# Altium PCB IMX6WBED.PcbDoc (part 8 of 10)
Units mil, origin at the board's own origin, x right, y up, seen from the top; angles counter-clockwise.
Board outline 3318.23 x 4815.16 mil, 6 copper layers (Top Layer, L2_GND_1, L3_INT_1, L6_INT_2, L7_PWR_2, Bottom Layer), stack 27.7 mil thick; 504 components, 400 nets, 2357 pads, 1199 vias.
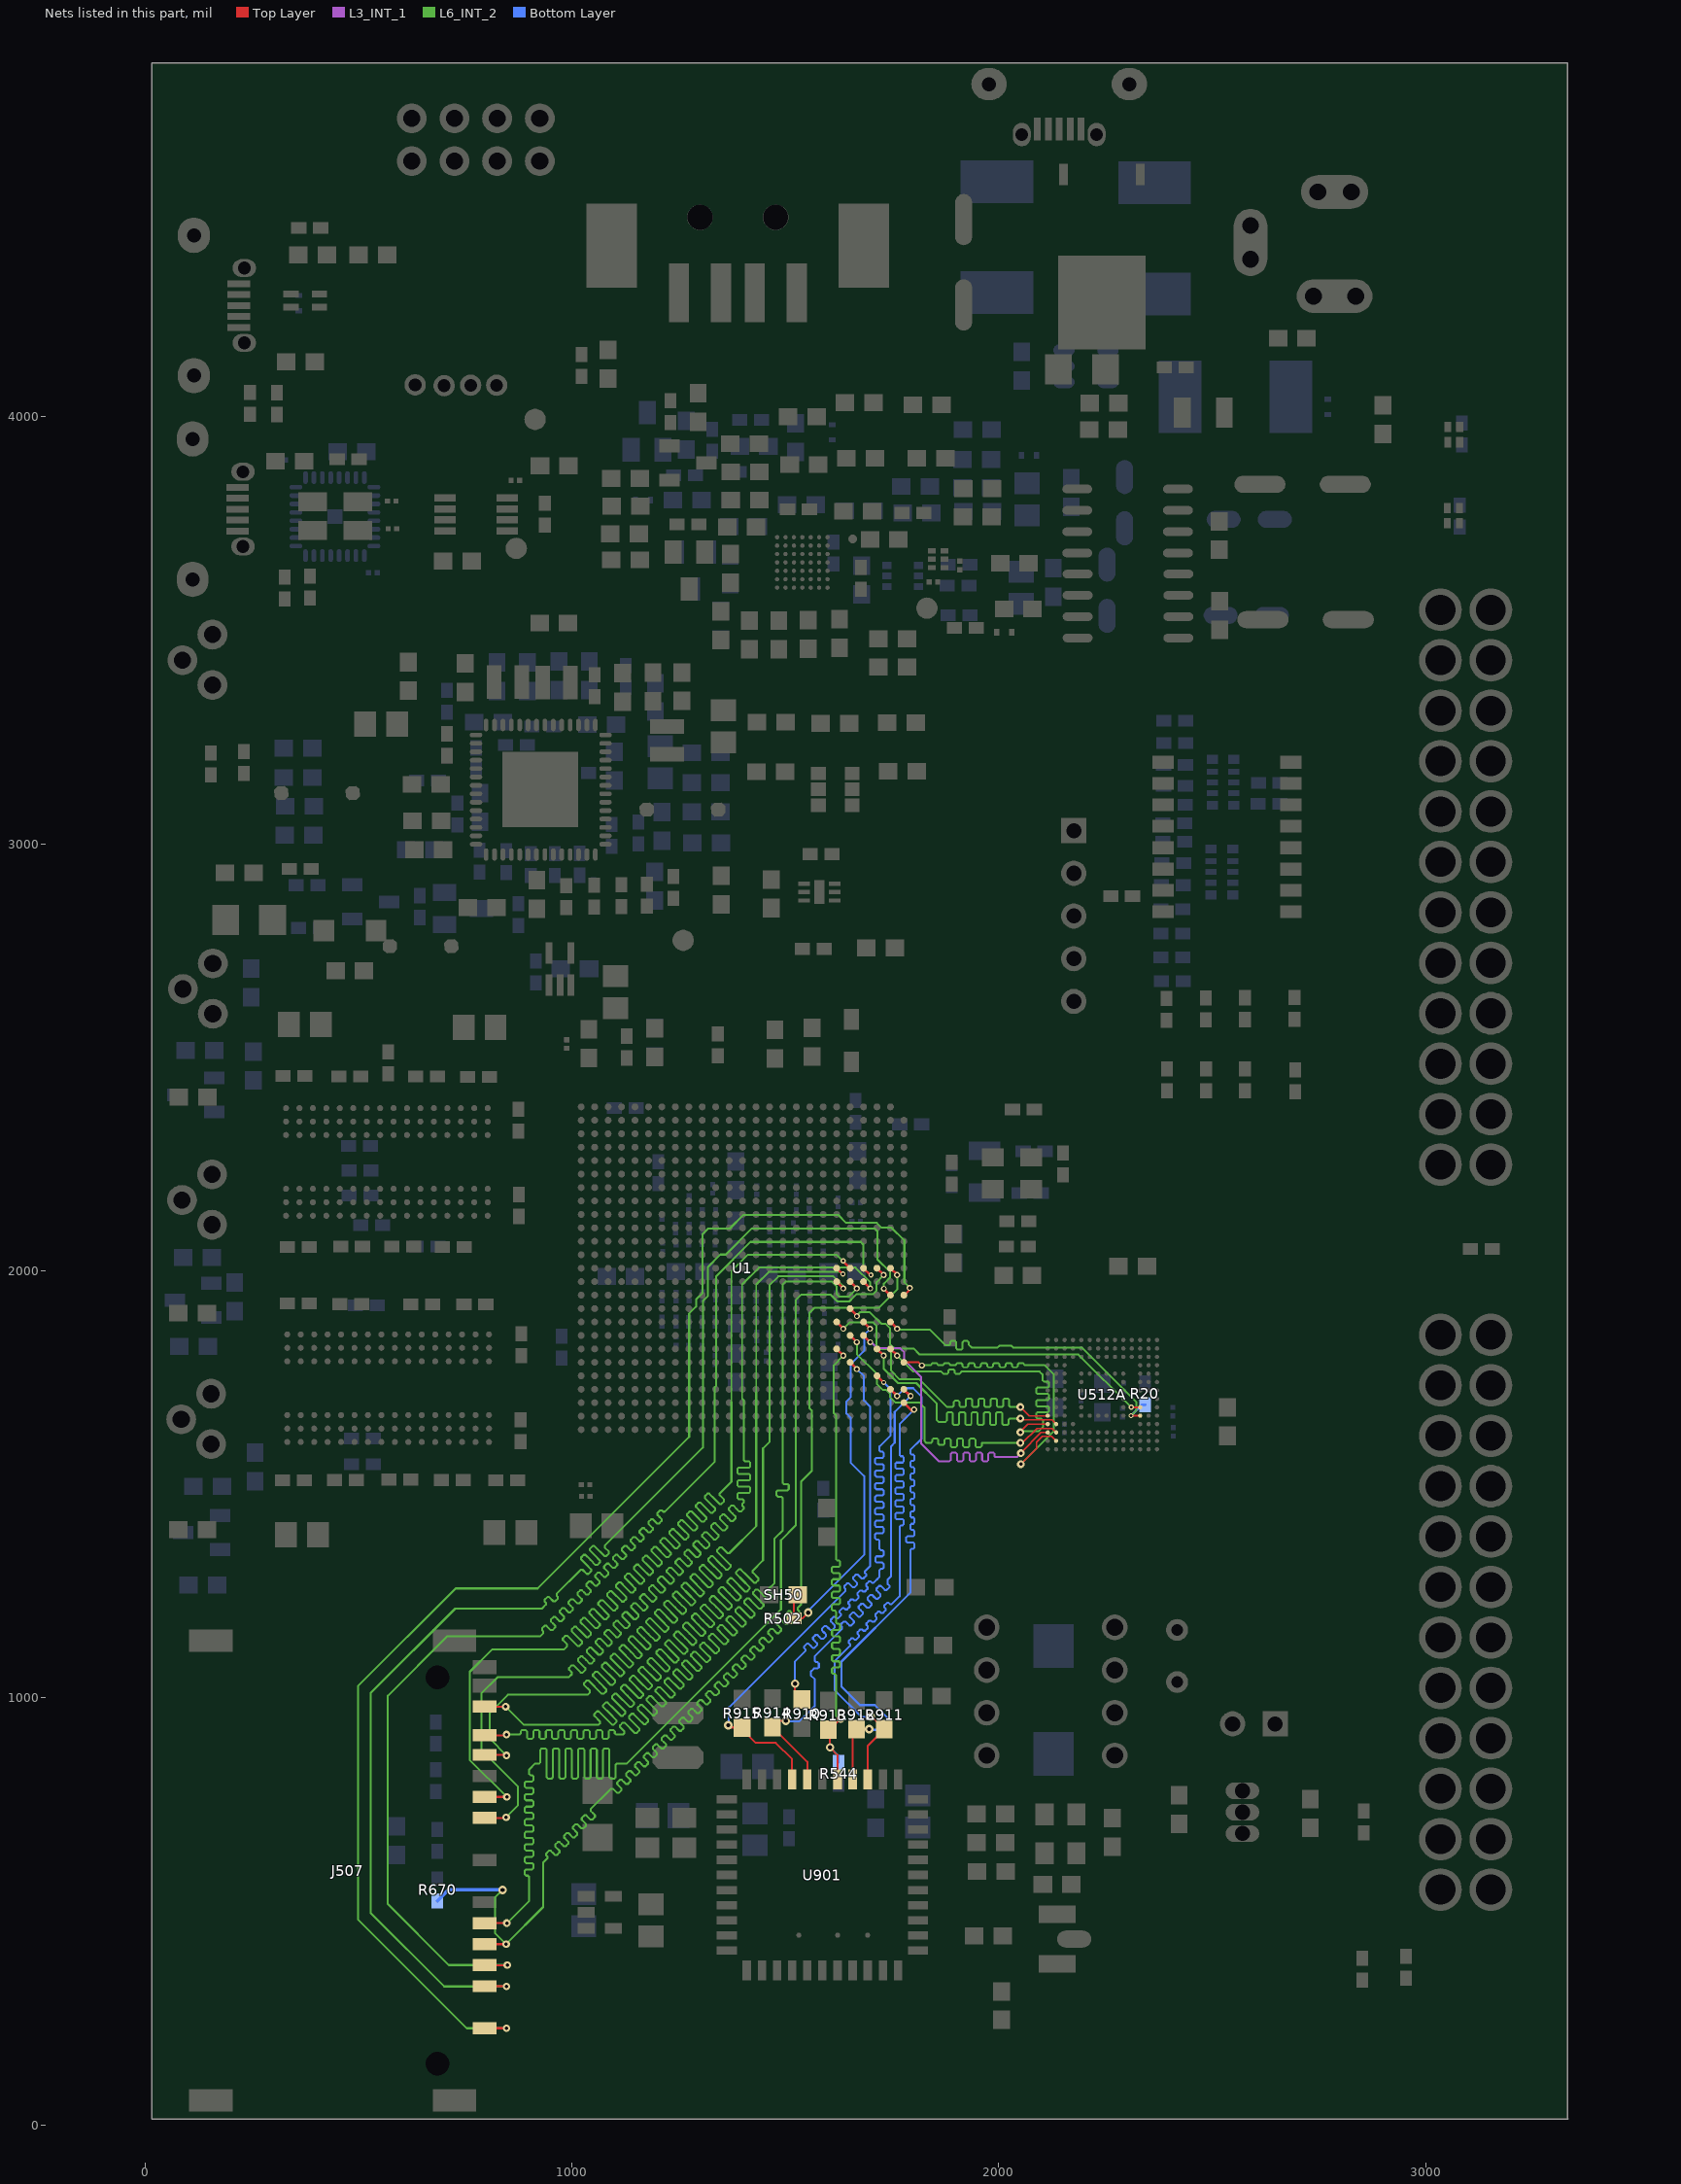
[diagram p12: the nets of this part, all layers, seen from the top]

## Via types
v1: diameter 14, hole 8, Top Layer to Bottom Layer, 296 vias
v2: diameter 14, hole 8, Top Layer to Bottom Layer, tented both sides, 244 vias
v3: diameter 20, hole 10, Top Layer to Bottom Layer, 221 vias
v4: diameter 20, hole 10, Top Layer to Bottom Layer, tented both sides, 112 vias
v5: diameter 18, hole 8, Top Layer to Bottom Layer, tented both sides, 74 vias
v6: diameter 12, hole 6, Top Layer to Bottom Layer, tented both sides, 60 vias
v7: diameter 16, hole 8, Top Layer to Bottom Layer, 59 vias
v8: diameter 30, hole 15, Top Layer to Bottom Layer, 33 vias
v9: diameter 40, hole 20, Top Layer to Bottom Layer, 16 vias
v10: diameter 30, hole 15, Top Layer to Bottom Layer, tented both sides, 16 vias
v11: diameter 18, hole 8, Top Layer to Bottom Layer, 16 vias
v12: diameter 12, hole 6, Top Layer to Bottom Layer, 13 vias
v13: diameter 16, hole 8, Top Layer to Bottom Layer, tented both sides, 8 vias
v14: diameter 80, hole 40, Top Layer to Bottom Layer, 5 vias
v15: diameter 14, hole 6, Top Layer to Bottom Layer, tented both sides, 4 vias
v16: diameter 50, hole 30, Top Layer to Bottom Layer, 3 vias
v17: diameter 16, hole 10, Top Layer to Bottom Layer, 3 vias
v18: diameter 25, hole 15, Top Layer to Bottom Layer, tented both sides, 3 vias
v19: diameter 35, hole 20, Top Layer to Bottom Layer, tented both sides, 3 vias
v20: diameter 10, hole 6, Top Layer to Bottom Layer, 3 vias
v21: diameter 18, hole 10, Top Layer to Bottom Layer, tented both sides, 2 vias
v22: diameter 80, hole 45, Top Layer to Bottom Layer, 1 vias
v23: diameter 40, hole 20, Top Layer to Bottom Layer, tented both sides, 1 vias
v24: diameter 11, hole 6, Top Layer to Bottom Layer, tented both sides, 1 vias
v25: diameter 13, hole 6, Top Layer to Bottom Layer, tented both sides, 1 vias
v26: diameter 14, hole 6, Top Layer to Bottom Layer, 1 vias

## Nets (pads, with @x,y where several pads share a name; then routed paths per layer and width w, separated by ;. In a path a pad name is that pad's centre, name@x,y a point inside that pad or via, vN(x,y) a via of type N, cw(c..) or ccw(c..) an arc to the next point about the centre after c; other vN are vias at no path point) (continued)
SD2_CLK: R910.2 U1.C21 | length 1300
  Top Layer w4.7: v3(1522.43,1033.01) 1522.43,1012.4 R910.2@1538.47,996.36
  Top Layer w6: U1.C21@1714.48,1753.98 v6(1730.23,1738.23)
  Bottom Layer w4.7: v3@1521.81,1031.01 v3@1522.43,1031.01 ; v3(1522.43,1033.01) 1522.43,1085.2 1531.81,1094.58 1546.55,1109.32 1546.55,1113.48 1543.84,1116.19 1543.84,1120.35 1550.08,1126.58 1554.24,1126.58 1559.03,1121.8 1563.81,1117.01 1567.97,1117.01 1574.21,1123.24 1574.21,1127.4 1569.42,1132.19 1564.63,1136.98 1564.63,1141.14 1570.87,1147.37 1575.03,1147.37 1579.81,1142.58 1584.6,1137.8 1588.76,1137.8 1595,1144.03 1595,1148.19 1590.21,1152.98 1585.42,1157.77 1585.42,1161.92 1591.66,1168.16 1595.82,1168.16 1600.6,1163.37 1605.39,1158.59 1609.55,1158.59 1615.79,1164.82 1615.79,1168.98 1611,1173.77 1606.21,1178.56 1606.21,1182.71 1612.45,1188.95 1616.61,1188.95 1619.31,1186.24 1623.47,1186.24 1629.71,1192.48 1629.71,1196.64 1627,1199.34 1627,1203.5 1633.24,1209.74 1637.39,1209.74 1640.1,1207.03 1644.26,1207.03 1650.5,1213.27 1650.5,1217.42 1647.79,1220.13 1647.79,1224.29 1654.03,1230.53 1658.18,1230.53 1660.89,1227.82 1665.05,1227.82 1671.29,1234.06 1671.29,1238.21 1668.58,1240.92 1668.58,1245.08 1674.81,1251.32 1678.97,1251.32 1681.68,1248.61 1685.84,1248.61 1692.07,1254.84 1692.07,1259 1689.37,1261.71 1689.37,1265.87 1695.6,1272.11 1699.76,1272.11 1702.47,1269.4 1706.63,1269.4 1714.94,1277.71 1720.14,1282.91 1720.14,1287.05 1720.14,1298.81 1723.08,1301.75 1726.91,1301.75 1729.85,1304.69 1729.85,1313.51 1726.91,1316.45 1720.14,1316.45 1713.37,1316.45 1710.43,1319.39 1710.43,1328.21 1713.37,1331.15 1720.14,1331.15 1726.91,1331.15 1729.85,1334.09 1729.85,1342.91 1726.91,1345.85 1723.08,1345.85 1720.14,1348.79 1720.14,1353.2 1720.14,1366.02 1720.14,1367.65 1717.2,1370.59 1713.16,1370.59 1710.22,1373.53 1710.22,1382.35 1713.16,1385.29 1720.14,1385.29 1727.12,1385.29 1730.06,1388.23 1730.06,1397.05 1727.12,1399.99 1720.14,1399.99 1713.16,1399.99 1710.22,1402.93 1710.22,1411.75 1713.16,1414.69 1720.14,1414.69 1727.12,1414.69 1730.06,1417.63 1730.06,1426.45 1727.12,1429.39 1720.14,1429.39 1713.16,1429.39 1710.22,1432.33 1710.22,1441.15 1713.16,1444.09 1720.14,1444.09 1727.12,1444.09 1730.06,1447.03 1730.06,1455.85 1727.12,1458.79 1720.14,1458.79 1713.16,1458.79 1710.22,1461.73 1710.22,1470.55 1713.16,1473.49 1720.14,1473.49 1727.12,1473.49 1730.06,1476.43 1730.06,1485.25 1727.12,1488.19 1720.14,1488.19 1713.16,1488.19 1710.22,1491.13 1710.22,1499.95 1713.16,1502.89 1720.14,1502.89 1727.12,1502.89 1730.06,1505.83 1730.06,1514.65 1727.12,1517.59 1720.14,1517.59 1713.16,1517.59 1710.22,1520.53 1710.22,1529.35 1713.16,1532.29 1720.14,1532.29 1727.12,1532.29 1730.06,1535.23 1730.06,1544.05 1727.12,1546.99 1720.14,1546.99 1713.16,1546.99 1710.22,1549.93 1710.22,1558.75 1713.16,1561.69 1720.14,1561.69 1727.12,1561.69 1730.06,1564.63 1730.06,1573.45 1727.12,1576.39 1723.08,1576.39 1720.14,1579.33 1720.14,1583.74 1720.14,1588.3 1746.47,1614.63 1746.47,1721.99 v6(1730.23,1738.23)
SD2_CMD: R544.1 R913.1 U1.F19 U901.16 | length 1342.2
  Top Layer w4.7: U901.16@1622,808.95 1622,866.07 v3(1604.29,883.78) 1604.29,918.21 1605.99,919.91 R913.1@1600.47,925.44 1604.02,925.44 v3(1629.76,951.18)
  Top Layer w6: U1.F19@1619.99,1816.97 v2(1635.74,1801.22)
  L6_INT_2 w4.5: 1613.47,1728.9 1613.38,1728.99 1613.38,1778.87 v2(1635.74,1801.22)
  L6_INT_2 w4.7: 1613.47,1728.9 1613.47,1666.9 1618.47,1661.9 1618.47,1329.07 1618.47,1324.66 1621.41,1321.72 1625.24,1321.72 1628.18,1318.78 1628.18,1309.96 1625.24,1307.02 1618.47,1307.02 1611.7,1307.02 1608.76,1304.08 1608.76,1295.26 1611.7,1292.32 1618.47,1292.32 1625.24,1292.32 1628.18,1289.38 1628.18,1280.56 1625.24,1277.62 1618.47,1277.62 1611.7,1277.62 1608.76,1274.68 1608.76,1265.86 1611.7,1262.92 1618.47,1262.92 1625.24,1262.92 1628.18,1259.98 1628.18,1251.16 1625.24,1248.22 1618.47,1248.22 1611.7,1248.22 1608.76,1245.28 1608.76,1236.46 1611.7,1233.52 1618.47,1233.52 1625.24,1233.52 1628.18,1230.58 1628.18,1221.76 1625.24,1218.82 1618.47,1218.82 1611.7,1218.82 1608.76,1215.88 1608.76,1207.06 1611.7,1204.12 1615.53,1204.12 1618.47,1201.18 1618.47,1184.69 1618.47,1180.83 1618.47,1176.42 1621.41,1173.48 1624.93,1173.48 1627.87,1170.54 1627.87,1161.72 1624.93,1158.78 1618.47,1158.78 1612.01,1158.78 1609.07,1155.84 1609.07,1147.02 1612.01,1144.08 1618.47,1144.08 1624.93,1144.08 1627.87,1141.14 1627.87,1132.32 1624.93,1129.38 1618.47,1129.38 1612.01,1129.38 1609.07,1126.44 1609.07,1117.62 1612.01,1114.68 1618.47,1114.68 1624.93,1114.68 1627.87,1111.74 1627.87,1102.92 1624.93,1099.98 1618.47,1099.98 1612.01,1099.98 1609.07,1097.04 1609.07,1088.22 1612.01,1085.28 1618.47,1085.28 1624.93,1085.28 1627.87,1082.34 1627.87,1073.52 1624.93,1070.58 1618.47,1070.58 1612.01,1070.58 1609.07,1067.64 1609.07,1058.82 1612.01,1055.88 1615.53,1055.88 1618.47,1052.94 1618.47,1043.94 1618.47,958.25 v3@1626.54,950.18
  Bottom Layer w4.7: v3(1604.29,883.78) 1624.47,863.6 R544.1@1624.47,848.49
SD2_DATA0: R914.1 U1.A22 U901.18 | length 1296.7
  Top Layer w4.7: v3(1501.07,945.91) 1483.94,945.91 R914.1@1469.47,931.44 1551.14,849.77 U901.18@1551.14,808.95
  Top Layer w6: U1.A22@1777.47,1722.48 v2(1793.22,1706.74)
  Bottom Layer w4.7: v3@1500.12,945.04 1532.65,945.04 1568.86,981.24 1568.86,1042.89 1559.11,1052.63 1559.11,1060.88 1566.66,1068.43 1575.32,1068.43 1578.25,1071.37 1578.25,1080.19 1575.32,1083.13 1571.79,1083.13 1568.86,1086.07 1568.86,1097.47 1632.7,1161.32 1632.7,1165.48 1630.07,1168.1 1630.07,1172.26 1636.31,1178.5 1640.47,1178.5 1645.17,1173.79 1649.88,1169.09 1654.04,1169.09 1660.27,1175.32 1660.27,1179.48 1650.86,1188.89 1650.86,1193.05 1657.1,1199.29 1661.25,1199.29 1670.67,1189.87 1674.83,1189.87 1681.06,1196.11 1681.06,1200.27 1676.36,1204.98 1671.65,1209.68 1671.65,1213.84 1677.89,1220.08 1682.04,1220.08 1691.46,1210.66 1695.61,1210.66 1701.85,1216.9 1701.85,1221.06 1692.44,1230.47 1692.44,1234.63 1698.68,1240.87 1702.83,1240.87 1707.54,1236.16 1712.25,1231.45 1716.4,1231.45 1722.64,1237.69 1722.64,1241.85 1717.93,1246.55 1713.23,1251.26 1713.23,1255.42 1719.46,1261.65 1723.62,1261.65 1733.03,1252.24 1737.19,1252.24 1743.43,1258.48 1743.43,1262.64 1739.13,1266.94 1739.13,1276.02 1747.38,1284.27 1747.38,1588.74 1755.8,1597.16 1755.8,1669.32 v2(1793.22,1706.74)
SD2_DATA1: R915.1 U1.E20 U901.19 | length 1296.5
  Top Layer w4.7: v3(1365.98,935.51) 1371.05,930.44 R915.1@1398.47,930.44 1398.47,926.25 1430.45,894.27 1477.19,894.27 1515.28,856.18 1515.28,809.38 U901.19@1515.71,808.95
  Top Layer w6: U1.E20@1651.49,1785.48 v2(1667.23,1769.73)
  Bottom Layer w4.7: v3@1367.47,935.51 1367.47,977.52 1640.58,1250.63 1640.58,1254.79 1638.09,1257.28 1638.09,1261.44 1644.33,1267.67 1648.49,1267.67 1653.05,1263.11 1657.62,1258.54 1661.78,1258.54 1668.02,1264.77 1668.02,1268.93 1663.45,1273.5 1658.88,1278.07 1658.88,1282.23 1665.12,1288.46 1669.27,1288.46 1678.41,1279.33 1682.57,1279.33 1688.8,1285.56 1688.8,1289.72 1686.32,1292.21 1686.32,1296.37 1698.47,1308.52 1698.47,1681.83 1683.77,1696.53 1683.77,1753.2 v2(1667.23,1769.73)
SD2_DATA2: R911.1 U1.A23 U901.14 | length 1294.6
  Top Layer w4.7: U901.14@1692.86,808.95 1692.86,887.83 R911.1@1731.47,926.44 1702.06,955.85 v3(1699.25,955.85)
  Top Layer w6: U1.A23@1777.47,1690.99 v2@1797.51,1670.94
  Bottom Layer w4.7: v3@1699.25,955.09 1678.26,955.09 1615.11,1018.24 1615.11,1085.51 1620.84,1091.24 1651.25,1121.65 1651.25,1125.81 1648.34,1128.73 1648.34,1132.88 1654.58,1139.12 1658.74,1139.12 1661.65,1136.21 1665.81,1136.21 1672.04,1142.44 1672.04,1146.6 1669.13,1149.51 1669.13,1153.67 1675.37,1159.91 1679.52,1159.91 1682.44,1157 1686.6,1157 1692.83,1163.23 1692.83,1167.39 1689.92,1170.3 1689.92,1174.46 1696.16,1180.7 1700.31,1180.7 1703.23,1177.78 1707.38,1177.78 1713.62,1184.02 1713.62,1188.18 1710.71,1191.09 1710.71,1195.25 1716.94,1201.49 1721.1,1201.49 1724.02,1198.57 1728.17,1198.57 1734.41,1204.81 1734.41,1208.97 1731.5,1211.88 1731.5,1216.04 1737.73,1222.28 1741.89,1222.28 1744.8,1219.36 1748.96,1219.36 1757.28,1227.68 1762.47,1232.88 1767.39,1237.79 1767.39,1400.92 1770.33,1403.86 1774.45,1403.86 1777.39,1406.8 1777.39,1415.62 1774.45,1418.56 1760.33,1418.56 1757.39,1421.5 1757.39,1430.32 1760.33,1433.26 1774.45,1433.26 1777.39,1436.2 1777.39,1445.02 1774.45,1447.96 1760.33,1447.96 1757.39,1450.9 1757.39,1459.72 1760.33,1462.66 1774.45,1462.66 1777.39,1465.6 1777.39,1474.42 1774.45,1477.36 1760.33,1477.36 1757.39,1480.3 1757.39,1489.12 1760.33,1492.06 1774.45,1492.06 1777.39,1495 1777.39,1503.82 1774.45,1506.76 1760.33,1506.76 1757.39,1509.7 1757.39,1518.52 1760.33,1521.46 1774.45,1521.46 1777.39,1524.4 1777.39,1533.22 1774.45,1536.16 1760.33,1536.16 1757.39,1539.1 1757.39,1547.92 1760.33,1550.86 1774.45,1550.86 1777.39,1553.8 1777.39,1562.62 1774.45,1565.56 1770.33,1565.56 1767.39,1568.5 1767.39,1640.82 v2(1801.47,1674.9)
SD2_DATA3: R912.1 U1.B22 U901.15 | length 1296
  Top Layer w4.7: U901.15@1657.43,808.95 1657.43,917.4 R912.1@1666.47,926.44
  Top Layer w6: U1.B22@1745.97,1722.48 v2(1761.72,1706.74)
  Bottom Layer w4.7: v3@1696.04,924.86 1729.36,924.86 1737.65,933.15 1737.65,954.52 1709.29,982.88 1674.39,982.88 1631.21,1026.06 1631.21,1084.69 1792.42,1245.9 1792.42,1345.09 1792.42,1345.73 1795.36,1348.67 1799.19,1348.67 1802.13,1351.61 1802.13,1360.43 1799.19,1363.37 1792.42,1363.37 1785.65,1363.37 1782.71,1366.31 1782.71,1375.13 1785.65,1378.07 1792.42,1378.07 1799.19,1378.07 1802.13,1381.01 1802.13,1389.83 1799.19,1392.77 1795.36,1392.77 1792.42,1395.71 1792.42,1404.53 1795.36,1407.47 1799.19,1407.47 1802.13,1410.41 1802.13,1419.23 1799.19,1422.17 1795.36,1422.17 1792.42,1425.11 1792.42,1433.93 1795.36,1436.87 1799.19,1436.87 1802.13,1439.81 1802.13,1448.63 1799.19,1451.57 1795.36,1451.57 1792.42,1454.51 1792.42,1463.33 1795.36,1466.27 1799.19,1466.27 1802.13,1469.21 1802.13,1478.03 1799.19,1480.97 1795.36,1480.97 1792.42,1483.91 1792.42,1492.73 1795.36,1495.67 1799.19,1495.67 1802.13,1498.61 1802.13,1507.43 1799.19,1510.37 1795.36,1510.37 1792.42,1513.31 1792.42,1522.13 1795.36,1525.07 1799.19,1525.07 1802.13,1528.01 1802.13,1536.83 1799.19,1539.77 1795.36,1539.77 1792.42,1542.71 1792.42,1551.53 1795.36,1554.47 1799.19,1554.47 1802.13,1557.41 1802.13,1566.23 1799.19,1569.17 1795.36,1569.17 1792.42,1572.11 1792.42,1576.52 1792.42,1580.03 1819.51,1607.12 1819.51,1704.86 1799.47,1724.9 1779.89,1724.9 v2(1761.72,1706.74)
  other v3: 1696.04,926.63
SD2_WP: R502.1 SH50.1 U1.D17 | length 875
  Top Layer w4.7: SH50.1@1523.93,1235.9 1520.06,1232.03 R502.1@1520.06,1185.9 1539.62,1185.9 v3(1553.26,1199.54)
  Top Layer w6: U1.D17@1682.98,1879.96 1698.73,1864.22 v2(1698.23,1864.22)
  Bottom Layer w4.7: v3@1549.61,1199.15 1549.61,1199.81 1684.47,1334.67 1684.47,1518.9 1652.47,1550.9 1652.47,1656.14 1642.98,1665.63 1642.98,1674.29 1642.87,1674.4 1642.87,1694.03 1652.47,1703.63 1652.47,1780.9 1684.47,1812.9 1684.47,1849.96 1698.73,1864.22 v2(1698.23,1864.22)
SD3_CLK: J507.5 U1.D14 | length 3217.5
  Top Layer w4.7: J507.5@795.34,718.52 v5@846.85,718.52
  Top Layer w6: U1.D14@1682.98,1974.45 v2(1698.73,1958.7)
  L6_INT_2 w4.5: 787.47,1009.9 787.47,877.9 873.47,791.9 873.47,747.9 v5(845.47,719.9) ; 1402.47,1696.9 1398.47,1700.9 1398.47,1967.9 1438.07,2007.5 1663.87,2007.5 1698.73,1972.64 v2(1698.73,1958.7)
  L6_INT_2 w4.7: 787.47,1009.9 825.47,1047.9 992.47,1047.9 999.59,1055.02 999.59,1059.18 993.14,1065.62 993.14,1069.78 999.38,1076.02 1003.53,1076.02 1020.59,1058.96 1024.75,1058.96 1030.98,1065.2 1030.98,1069.36 1013.93,1086.41 1013.93,1090.57 1020.17,1096.81 1024.32,1096.81 1032.85,1088.28 1041.38,1079.75 1045.54,1079.75 1051.77,1085.99 1051.77,1090.15 1034.72,1107.2 1034.72,1111.36 1040.95,1117.6 1045.11,1117.6 1062.17,1100.54 1066.33,1100.54 1072.56,1106.78 1072.56,1110.94 1064.03,1119.46 1055.51,1127.99 1055.51,1132.15 1061.74,1138.39 1065.9,1138.39 1082.96,1121.33 1087.11,1121.33 1093.35,1127.57 1093.35,1131.73 1076.3,1148.78 1076.3,1152.94 1082.53,1159.18 1086.69,1159.18 1103.75,1142.12 1107.9,1142.12 1114.14,1148.36 1114.14,1152.51 1097.08,1169.57 1097.08,1173.73 1103.32,1179.96 1107.48,1179.96 1124.53,1162.91 1128.69,1162.91 1134.93,1169.15 1134.93,1173.3 1117.87,1190.36 1117.87,1194.52 1124.11,1200.75 1128.27,1200.75 1145.32,1183.7 1149.48,1183.7 1155.72,1189.93 1155.72,1194.09 1138.66,1211.15 1138.66,1215.31 1144.9,1221.54 1149.06,1221.54 1166.11,1204.49 1170.27,1204.49 1176.51,1210.72 1176.51,1214.88 1167.98,1223.41 1159.45,1231.94 1159.45,1236.09 1165.69,1242.33 1169.85,1242.33 1186.9,1225.28 1191.06,1225.28 1197.3,1231.51 1197.3,1235.67 1180.24,1252.73 1180.24,1256.88 1186.48,1263.12 1190.63,1263.12 1207.69,1246.06 1211.85,1246.06 1218.08,1252.3 1218.08,1256.46 1201.03,1273.51 1201.03,1277.67 1207.27,1283.91 1211.42,1283.91 1228.48,1266.85 1232.64,1266.85 1238.87,1273.09 1238.87,1277.25 1221.82,1294.3 1221.82,1298.46 1228.05,1304.7 1232.21,1304.7 1249.27,1287.64 1253.43,1287.64 1259.66,1293.88 1259.66,1298.04 1242.61,1315.09 1242.61,1319.25 1248.84,1325.49 1253,1325.49 1270.06,1308.43 1274.21,1308.43 1280.45,1314.67 1280.45,1318.83 1271.92,1327.35 1263.4,1335.88 1263.4,1340.04 1269.63,1346.28 1273.79,1346.28 1290.85,1329.22 1295,1329.22 1301.24,1335.46 1301.24,1339.61 1284.18,1356.67 1284.18,1360.83 1290.42,1367.06 1294.58,1367.06 1303.11,1358.54 1311.63,1350.01 1315.79,1350.01 1322.03,1356.25 1322.03,1360.4 1304.97,1377.46 1304.97,1381.62 1311.21,1387.85 1315.37,1387.85 1332.42,1370.8 1336.58,1370.8 1342.82,1377.03 1342.82,1381.19 1325.76,1398.25 1325.76,1402.41 1332,1408.64 1336.16,1408.64 1353.21,1391.59 1357.37,1391.59 1363.61,1397.82 1363.61,1401.98 1346.55,1419.04 1346.55,1423.19 1352.79,1429.43 1356.95,1429.43 1365.47,1420.9 1372.73,1413.65 1376.88,1413.65 1383.12,1419.89 1383.12,1424.04 1375.87,1431.3 1367.34,1439.83 1367.34,1443.98 1373.58,1450.22 1377.73,1450.22 1386.26,1441.69 1391.72,1436.24 1395.88,1436.24 1402.11,1442.47 1402.11,1446.63 1398.74,1450.01 1398.74,1454.17 1402.47,1457.9 1402.47,1462.31 1399.53,1465.25 1390.41,1465.25 1387.47,1468.19 1387.47,1477.01 1390.41,1479.95 1414.53,1479.95 1417.47,1482.89 1417.47,1491.71 1414.53,1494.65 1390.41,1494.65 1387.47,1497.59 1387.47,1506.41 1390.41,1509.35 1414.53,1509.35 1417.47,1512.29 1417.47,1521.11 1414.53,1524.05 1390.41,1524.05 1387.47,1526.99 1387.47,1535.81 1390.41,1538.75 1414.53,1538.75 1417.47,1541.69 1417.47,1550.51 1414.53,1553.45 1405.41,1553.45 1402.47,1556.39 1402.47,1696.9
SD3_CMD: J507.2 R670.1 U1.B13 | length 3277.5
  Top Layer w4.7: J507.2@795.34,422.85 v5(845.47,422.85) v5@846.42,422.85
  Top Layer w6: U1.B13@1745.97,2005.95 v2(1761.72,1990.2)
  L6_INT_2 w4.7: v4(837.47,549.9) 819.47,531.9 819.47,448.85 v5(845.47,422.85) 932.47,509.85 932.47,613.9 942.6,624.03 942.6,628.19 939.69,631.1 939.69,635.26 945.93,641.5 950.08,641.5 955.08,636.51 960.07,631.51 964.23,631.51 970.46,637.75 970.46,641.91 960.48,651.89 960.48,656.05 966.72,662.29 970.87,662.29 975.87,657.3 980.86,652.3 985.02,652.3 991.25,658.54 991.25,662.7 986.26,667.69 981.27,672.68 981.27,676.84 987.5,683.08 991.66,683.08 1001.65,673.09 1005.8,673.09 1012.04,679.33 1012.04,683.49 1002.06,693.47 1002.06,697.63 1008.29,703.87 1012.45,703.87 1017.44,698.87 1022.44,693.88 1026.59,693.88 1032.83,700.12 1032.83,704.28 1022.85,714.26 1022.85,718.42 1029.08,724.65 1033.24,724.65 1043.22,714.67 1047.38,714.67 1053.62,720.91 1053.62,725.07 1048.63,730.06 1043.63,735.05 1043.63,739.21 1087.6,783.18 1091.45,787.02 1095.61,787.02 1105.59,777.04 1109.75,777.04 1115.99,783.27 1115.99,787.43 1106,797.42 1106,801.57 1112.24,807.81 1116.4,807.81 1121.39,802.82 1126.38,797.83 1130.54,797.83 1136.78,804.06 1136.78,808.22 1126.79,818.21 1126.79,822.36 1133.03,828.6 1137.19,828.6 1147.17,818.62 1151.33,818.62 1157.56,824.85 1157.56,829.01 1152.57,834 1147.58,838.99 1147.58,843.15 1153.82,849.39 1157.97,849.39 1162.97,844.4 1167.96,839.4 1172.12,839.4 1178.35,845.64 1178.35,849.8 1168.37,859.78 1168.37,863.94 1174.61,870.18 1178.76,870.18 1183.76,865.19 1188.75,860.19 1192.91,860.19 1199.14,866.43 1199.14,870.59 1194.15,875.58 1189.16,880.57 1189.16,884.73 1195.39,890.97 1199.55,890.97 1209.54,880.98 1213.69,880.98 1219.93,887.22 1219.93,891.38 1214.94,896.37 1209.95,901.36 1209.95,905.52 1216.18,911.76 1220.34,911.76 1225.33,906.76 1230.33,901.77 1234.48,901.77 1240.72,908.01 1240.72,912.17 1230.74,922.15 1230.74,926.31 1236.97,932.54 1241.13,932.54 1251.11,922.56 1255.27,922.56 1261.51,928.8 1261.51,932.95 1256.52,937.95 1251.52,942.94 1251.52,947.1 1257.76,953.33 1261.92,953.33 1271.9,943.35 1276.06,943.35 1282.3,949.59 1282.3,953.74 1272.31,963.73 1272.31,967.89 1278.55,974.12 1282.71,974.12 1287.7,969.13 1292.69,964.14 1296.85,964.14 1303.09,970.37 1303.09,974.53 1298.09,979.52 1293.1,984.52 1293.1,988.67 1299.34,994.91 1303.5,994.91 1313.48,984.93 1317.64,984.93 1323.88,991.16 1323.88,995.32 1318.88,1000.31 1313.89,1005.31 1313.89,1009.46 1320.13,1015.7 1324.29,1015.7 1329.28,1010.71 1334.27,1005.72 1338.43,1005.72 1344.66,1011.95 1344.66,1016.11 1334.68,1026.09 1334.68,1030.25 1340.92,1036.49 1345.07,1036.49 1355.06,1026.5 1359.22,1026.5 1365.45,1032.74 1365.45,1036.9 1360.46,1041.89 1355.47,1046.88 1355.47,1051.04 1361.71,1057.28 1365.86,1057.28 1375.85,1047.29 1380.01,1047.29 1386.24,1053.53 1386.24,1057.69 1376.26,1067.67 1376.26,1071.83 1382.49,1078.07 1386.65,1078.07 1391.64,1073.07 1396.64,1068.08 1400.79,1068.08 1407.03,1074.32 1407.03,1078.48 1402.04,1083.47 1397.05,1088.46 1397.05,1092.62 1403.28,1098.86 1407.44,1098.86 1417.43,1088.87 1421.58,1088.87 1427.82,1095.11 1427.82,1099.27 1422.83,1104.26 1417.84,1109.25 1417.84,1113.41 1424.07,1119.64 1428.23,1119.64 1433.22,1114.65 1438.21,1109.66 1442.37,1109.66 1448.61,1115.9 1448.61,1120.05 1438.62,1130.04 1438.62,1134.2 1444.86,1140.43 1449.02,1140.43 1459,1130.45 1463.16,1130.45 1469.4,1136.69 1469.4,1140.84 1464.41,1145.84 1459.41,1150.83 1459.41,1154.99 1465.65,1161.22 1469.81,1161.22 1479.79,1151.24 1483.95,1151.24 1490.19,1157.47 1490.19,1161.63 1480.2,1171.62 1480.2,1175.77 1486.44,1182.01 1490.6,1182.01 1495.59,1177.02 1500.58,1172.03 1504.74,1172.03 1510.98,1178.26 1510.98,1182.42 1505.98,1187.41 1500.99,1192.41 1500.99,1196.56 1507.23,1202.8 1511.39,1202.8 1521.37,1192.82 1525.53,1192.82 1531.76,1199.05 1531.76,1203.21 1528.85,1206.12 1528.85,1210.28 1536.47,1217.9 1536.47,1505.9 1561.52,1530.95 1561.52,1672.6 1556.41,1677.71 1556.41,1766.07 1556.32,1766.16 1556.32,1777.64 1556.12,1777.84 1556.12,1901.55 1567.47,1912.9 1718.47,1912.9 1761.72,1956.15 v2(1761.72,1990.2)
  Bottom Layer w8: R670.1@684.47,524.31 710.06,549.9 v4@835.47,549.9
SD3_DATA0: J507.7 U1.E14 | length 3235.4
  Top Layer w4.7: J507.7@795.34,912.22 v5@848.47,912.22
  Top Layer w6: U1.E14@1651.49,1974.45 v2(1667.23,1958.7)
  L6_INT_2 w4.5: 1493.47,1560.9 1493.79,1561.22 1493.79,1733.55 1493.88,1733.64 1493.88,1968.31 1500.47,1974.9 1608.47,1974.9 1619.47,1963.9 1619.47,1946.28 1626.46,1939.29 1647.82,1939.29 ; 1654.98,1946.45 1647.82,1939.29 ; v2(1667.23,1958.7) 1647.82,1939.29
  L6_INT_2 w4.7: v5(846.47,913.9) 876.88,913.9 879.82,916.84 879.82,920.96 882.76,923.9 891.58,923.9 894.52,920.96 894.52,906.84 897.46,903.9 906.28,903.9 909.22,906.84 909.22,920.96 912.16,923.9 920.98,923.9 923.92,920.96 923.92,906.84 926.86,903.9 935.68,903.9 938.62,906.84 938.62,920.96 941.56,923.9 950.38,923.9 953.32,920.96 953.32,906.84 956.26,903.9 965.08,903.9 968.02,906.84 968.02,920.96 970.96,923.9 979.78,923.9 982.72,920.96 982.72,906.84 985.66,903.9 994.48,903.9 997.42,906.84 997.42,920.96 1000.36,923.9 1009.18,923.9 1012.12,920.96 1012.12,906.84 1015.06,903.9 1023.88,903.9 1026.82,906.84 1026.82,920.96 1029.76,923.9 1038.58,923.9 1041.52,920.96 1041.52,906.84 1044.46,903.9 1053.28,903.9 1056.22,906.84 1056.22,920.96 1059.16,923.9 1067.98,923.9 1070.92,920.96 1070.92,906.84 1073.86,903.9 1082.68,903.9 1085.62,906.84 1085.62,920.96 1088.56,923.9 1097.38,923.9 1100.32,920.96 1100.32,916.84 1103.26,913.9 1119.47,913.9 1122.59,917.02 1122.59,921.18 1112.6,931.16 1112.6,935.32 1118.84,941.55 1123,941.55 1147.12,917.43 1151.28,917.43 1157.52,923.67 1157.52,927.82 1145.46,939.89 1133.39,951.95 1133.39,956.11 1139.63,962.34 1143.79,962.34 1155.85,950.28 1167.91,938.22 1172.07,938.22 1178.31,944.45 1178.31,948.61 1166.25,960.68 1154.18,972.74 1154.18,976.9 1160.42,983.13 1164.58,983.13 1176.64,971.07 1188.7,959.01 1192.86,959.01 1199.1,965.24 1199.1,969.4 1187.03,981.46 1174.97,993.53 1174.97,997.69 1181.21,1003.92 1185.37,1003.92 1197.43,991.86 1209.49,979.8 1213.65,979.8 1219.89,986.03 1219.89,990.19 1195.76,1014.32 1195.76,1018.47 1202,1024.71 1206.15,1024.71 1218.22,1012.65 1230.28,1000.58 1234.44,1000.58 1240.68,1006.82 1240.68,1010.98 1228.61,1023.04 1216.55,1035.11 1216.55,1039.26 1222.79,1045.5 1226.94,1045.5 1251.07,1021.37 1255.23,1021.37 1261.46,1027.61 1261.46,1031.77 1249.4,1043.83 1237.34,1055.89 1237.34,1060.05 1243.57,1066.29 1247.73,1066.29 1259.8,1054.23 1271.86,1042.16 1276.02,1042.16 1282.25,1048.4 1282.25,1052.56 1270.19,1064.62 1258.13,1076.68 1258.13,1080.84 1264.36,1087.08 1268.52,1087.08 1280.58,1075.01 1292.65,1062.95 1296.81,1062.95 1303.04,1069.19 1303.04,1073.35 1290.98,1085.41 1278.92,1097.47 1278.92,1101.63 1285.15,1107.87 1289.31,1107.87 1301.37,1095.8 1313.44,1083.74 1317.59,1083.74 1323.83,1089.98 1323.83,1094.13 1311.77,1106.2 1299.7,1118.26 1299.7,1122.42 1305.94,1128.66 1310.1,1128.66 1322.16,1116.59 1334.23,1104.53 1338.38,1104.53 1344.62,1110.77 1344.62,1114.92 1332.56,1126.99 1320.49,1139.05 1320.49,1143.21 1326.73,1149.44 1330.89,1149.44 1355.01,1125.32 1359.17,1125.32 1365.41,1131.55 1365.41,1135.71 1353.35,1147.78 1341.28,1159.84 1341.28,1164 1347.52,1170.23 1351.68,1170.23 1363.74,1158.17 1375.8,1146.11 1379.96,1146.11 1386.2,1152.34 1386.2,1156.5 1362.07,1180.63 1362.07,1184.79 1368.31,1191.02 1372.47,1191.02 1384.53,1178.96 1396.59,1166.9 1400.75,1166.9 1406.99,1173.13 1406.99,1177.29 1394.92,1189.35 1382.86,1201.42 1382.86,1205.57 1389.1,1211.81 1393.25,1211.81 1405.32,1199.75 1417.38,1187.68 1421.54,1187.68 1427.78,1193.92 1427.78,1198.08 1415.71,1210.14 1403.65,1222.21 1403.65,1226.36 1409.89,1232.6 1414.04,1232.6 1426.11,1220.54 1438.17,1208.47 1442.33,1208.47 1448.56,1214.71 1448.56,1218.87 1436.5,1230.93 1424.44,1242.99 1424.44,1247.15 1430.67,1253.39 1434.83,1253.39 1458.96,1229.26 1463.12,1229.26 1469.35,1235.5 1469.35,1239.66 1459.37,1249.64 1459.37,1253.8 1474.47,1268.9 1474.47,1372.9 1493.47,1391.9 1493.47,1468.09 1490.53,1471.03 1482.1,1471.03 1479.16,1473.97 1479.16,1482.79 1482.1,1485.73 1504.84,1485.73 1507.78,1488.67 1507.78,1497.49 1504.84,1500.43 1496.41,1500.43 1493.47,1503.37 1493.47,1560.9
SD3_DATA1: J507.8 U1.F14 | length 3278.6
  Top Layer w4.7: J507.8@795.34,979.15 v5(844.47,979.15) v5@845.47,979.15
  Top Layer w6: U1.F14@1619.99,1974.45 v2(1635.74,1958.7)
  L6_INT_2 w4.5: 1462.47,1598.9 1462.47,1965.9 1483.47,1986.9 1612.47,1986.9 1635.74,1963.63 v2(1635.74,1958.7)
  L6_INT_2 w4.7: v5(844.47,979.15) 886.72,936.9 1062.47,936.9 1065.59,940.02 1065.59,944.18 1052.07,957.7 1052.07,961.85 1058.31,968.09 1062.46,968.09 1093.66,936.89 1097.82,936.89 1104.05,943.13 1104.05,947.29 1088.46,962.89 1072.86,978.48 1072.86,982.64 1079.09,988.88 1083.25,988.88 1098.85,973.28 1114.45,957.68 1118.61,957.68 1124.84,963.92 1124.84,968.08 1093.65,999.27 1093.65,1003.43 1099.88,1009.67 1104.04,1009.67 1135.24,978.47 1139.4,978.47 1145.63,984.71 1145.63,988.87 1130.03,1004.46 1114.44,1020.06 1114.44,1024.22 1120.67,1030.46 1124.83,1030.46 1156.03,999.26 1160.19,999.26 1166.42,1005.5 1166.42,1009.65 1135.22,1040.85 1135.22,1045.01 1141.46,1051.25 1145.62,1051.25 1161.22,1035.65 1176.82,1020.05 1180.97,1020.05 1187.21,1026.29 1187.21,1030.44 1171.61,1046.04 1156.01,1061.64 1156.01,1065.8 1162.25,1072.04 1166.41,1072.04 1197.61,1040.84 1201.76,1040.84 1208,1047.07 1208,1051.23 1192.4,1066.83 1176.8,1082.43 1176.8,1086.59 1183.04,1092.82 1187.2,1092.82 1202.8,1077.23 1218.39,1061.63 1222.55,1061.63 1228.79,1067.86 1228.79,1072.02 1197.59,1103.22 1197.59,1107.38 1203.83,1113.61 1207.99,1113.61 1239.18,1082.42 1243.34,1082.42 1249.58,1088.65 1249.58,1092.81 1233.98,1108.41 1218.38,1124.01 1218.38,1128.17 1224.62,1134.4 1228.77,1134.4 1259.97,1103.2 1264.13,1103.2 1270.37,1109.44 1270.37,1113.6 1239.17,1144.8 1239.17,1148.95 1245.41,1155.19 1249.56,1155.19 1265.16,1139.59 1280.76,1123.99 1284.92,1123.99 1291.16,1130.23 1291.16,1134.39 1275.56,1149.99 1259.96,1165.59 1259.96,1169.74 1266.19,1175.98 1270.35,1175.98 1301.55,1144.78 1305.71,1144.78 1311.94,1151.02 1311.94,1155.18 1296.35,1170.78 1280.75,1186.37 1280.75,1190.53 1286.98,1196.77 1291.14,1196.77 1306.74,1181.17 1322.34,1165.57 1326.5,1165.57 1332.73,1171.81 1332.73,1175.97 1301.54,1207.16 1301.54,1211.32 1307.77,1217.56 1311.93,1217.56 1343.13,1186.36 1347.29,1186.36 1353.52,1192.6 1353.52,1196.75 1337.92,1212.35 1322.32,1227.95 1322.32,1232.11 1328.56,1238.35 1332.72,1238.35 1363.92,1207.15 1368.07,1207.15 1374.31,1213.39 1374.31,1217.54 1343.11,1248.74 1343.11,1252.9 1349.35,1259.14 1353.51,1259.14 1369.11,1243.54 1384.71,1227.94 1388.86,1227.94 1395.1,1234.17 1395.1,1238.33 1363.9,1269.53 1363.9,1273.69 1370.14,1279.92 1374.3,1279.92 1405.49,1248.73 1409.65,1248.73 1415.89,1254.96 1415.89,1259.12 1400.29,1274.72 1384.69,1290.32 1384.69,1294.48 1390.93,1300.71 1395.09,1300.71 1410.68,1285.11 1426.28,1269.52 1430.44,1269.52 1436.68,1275.75 1436.68,1279.91 1423.16,1293.43 1423.16,1297.59 1447.36,1321.79 1447.36,1583.79 1462.47,1598.9
SD3_DATA2: J507.9 U1.A15 | length 3215.5
  Top Layer w4.7: J507.9@795.34,226 v5(846.47,226)
  Top Layer w5: U1.A15@1777.47,1942.96 1778.53,1942.96 1793.47,1957.9 1791.77,1959.6 v2(1791.28,1959.6)
  L6_INT_2 w4.5: 1714.18,2112.19 1725.47,2100.9
  L6_INT_2 w4.7: v5(846.47,226) 753.37,226 498.47,480.9 498.47,1026.9 727.55,1255.98 919.55,1255.98 1274.46,1610.89 1274.46,1899.9 1290.61,1916.05 1290.61,1932.64 1305.97,1948 1305.97,2086.4 1318.47,2098.9 1369.47,2098.9 1401.71,2131.14 1623.31,2131.14 1642.26,2112.19 1714.18,2112.19 ; 1725.47,2100.9 1748.47,2100.9 1778.47,2070.9
  L6_INT_2 w5: 1778.47,2070.9 1778.47,1972.9 1791.77,1959.6 v2(1791.28,1959.6)
SD3_DATA3: J507.1 U1.B15 | length 3216.3
  Top Layer w4.7: J507.1@795.34,324.42 v5@844.95,324.42
  Top Layer w6: v2(1730.47,1957.9) 1745.41,1942.96 U1.B15@1745.97,1942.96
  L6_INT_2 w4.7: v5(846.47,323.9) 700.47,323.9 528.47,495.9 528.47,1010.9 726.41,1208.84 929.41,1208.84 938.84,1218.27 938.84,1222.43 935.93,1225.34 935.93,1229.5 942.17,1235.74 946.32,1235.74 956.31,1225.75 960.47,1225.75 966.7,1231.99 966.7,1236.15 963.79,1239.06 963.79,1243.22 1020.45,1299.88 1024.61,1299.88 1034.37,1290.12 1038.53,1290.12 1044.77,1296.35 1044.77,1300.51 1032.92,1312.35 1021.08,1324.2 1021.08,1328.36 1027.32,1334.59 1031.47,1334.59 1043.32,1322.75 1055.16,1310.91 1059.32,1310.91 1065.56,1317.14 1065.56,1321.3 1053.71,1333.14 1041.87,1344.99 1041.87,1349.15 1048.11,1355.38 1052.26,1355.38 1075.95,1331.69 1080.11,1331.69 1086.35,1337.93 1086.35,1342.09 1076.58,1351.85 1076.58,1356.01 1306.47,1585.9 1306.47,1929.35 1318.54,1941.42 1318.54,2008.97 1347.47,2037.9 1360.47,2037.9 1421.53,2098.96 1683.14,2098.96 1683.5,2099.32 1709.05,2099.32 1715.47,2092.9 1715.47,2026.9 1745.47,1996.9 1745.47,1984.9 1730.47,1969.9 v2(1730.47,1957.9)
SD3_DATA4: J507.10 U1.D13 | length 3235.5
  Top Layer w4.7: J507.10@795.34,373.64 v5@847.21,373.64
  Top Layer w6: U1.D13@1682.98,2005.95 1699.03,1989.9 v6(1700.47,1989.9)
  L6_INT_2 w4.7: v5(848.47,373.9) 711.47,373.9 568.47,516.9 568.47,1004.61 708.12,1144.25 925.82,1144.25 932.6,1151.03 932.6,1155.19 929.69,1158.11 929.69,1162.26 935.93,1168.5 940.09,1168.5 950.07,1158.52 954.23,1158.52 960.46,1164.75 960.46,1168.91 955.47,1173.9 950.48,1178.89 950.48,1183.05 956.72,1189.29 960.87,1189.29 965.87,1184.3 970.86,1179.3 975.02,1179.3 981.25,1185.54 981.25,1189.7 971.27,1199.68 971.27,1203.84 977.51,1210.08 981.66,1210.08 991.65,1200.09 995.81,1200.09 1002.04,1206.33 1002.04,1210.49 997.05,1215.48 992.06,1220.47 992.06,1224.63 998.29,1230.87 1002.45,1230.87 1012.44,1220.88 1016.59,1220.88 1022.83,1227.12 1022.83,1231.28 1012.85,1241.26 1012.85,1245.42 1019.08,1251.66 1023.24,1251.66 1028.23,1246.66 1033.23,1241.67 1037.38,1241.67 1043.62,1247.91 1043.62,1252.07 1038.63,1257.06 1033.64,1262.05 1033.64,1266.21 1039.87,1272.45 1044.03,1272.45 1054.01,1262.46 1058.17,1262.46 1064.41,1268.7 1064.41,1272.86 1059.42,1277.85 1054.43,1282.84 1054.43,1287 1060.66,1293.23 1064.82,1293.23 1069.81,1288.24 1074.8,1283.25 1078.96,1283.25 1085.2,1289.49 1085.2,1293.64 1075.21,1303.63 1075.21,1307.79 1081.45,1314.02 1085.61,1314.02 1095.59,1304.04 1099.75,1304.04 1105.99,1310.28 1105.99,1314.43 1101,1319.43 1096,1324.42 1096,1328.58 1102.24,1334.81 1106.4,1334.81 1116.38,1324.83 1120.54,1324.83 1126.78,1331.06 1126.78,1335.22 1116.79,1345.21 1116.79,1349.36 1123.03,1355.6 1127.19,1355.6 1132.18,1350.61 1137.17,1345.62 1141.33,1345.62 1147.57,1351.85 1147.57,1356.01 1142.57,1361 1137.58,1366 1137.58,1370.15 1143.82,1376.39 1147.98,1376.39 1157.96,1366.41 1162.12,1366.41 1168.35,1372.64 1168.35,1376.8 1163.36,1381.79 1158.37,1386.78 1158.37,1390.94 1164.61,1397.18 1168.76,1397.18 1173.76,1392.19 1178.75,1387.19 1182.91,1387.19 1189.14,1393.43 1189.14,1397.59 1179.16,1407.57 1179.16,1411.73 1185.4,1417.97 1189.55,1417.97 1199.54,1407.98 1203.7,1407.98 1209.93,1414.22 1209.93,1418.38 1204.94,1423.37 1199.95,1428.36 1199.95,1432.52 1206.18,1438.76 1210.34,1438.76 1213.26,1435.84 1217.41,1435.84 1333.71,1552.14 1333.71,1726.65 1337.82,1730.76 1337.82,1747.04 1337.82,1987.25 1418.18,2067.61 1569.77,2067.61 1581.27,2067.59 1581.39,2067.47 1676.21,2067.47 1682.47,2061.21 1682.47,2006.46 1699.03,1989.9 v6(1700.47,1989.9)
SD3_DATA5: J507.11 U1.C13 | length 3251.7
  Top Layer w4.7: J507.11@795.34,472.06 v5(847.31,472.06)
  Top Layer w6: U1.C13@1714.48,2005.95 v2(1730.23,1990.2)
  L6_INT_2 w4.5: v5(847.31,472.06) 899.47,524.22 ; 1524.26,1769.01 1524.31,1769.06 1524.31,1931.74 1536.47,1943.9 1606.22,1943.9 1622.03,1928.09 1649.47,1928.09 1660.33,1938.95 1666.28,1944.9 1704.47,1944.9 1713.47,1953.9
  L6_INT_2 w4.7: 899.47,524.22 899.47,580.41 896.53,583.35 892.41,583.35 889.47,586.29 889.47,595.11 892.41,598.05 906.53,598.05 909.47,600.99 909.47,609.81 906.53,612.75 892.41,612.75 889.47,615.69 889.47,624.51 892.41,627.45 906.53,627.45 909.47,630.39 909.47,639.21 906.53,642.15 892.41,642.15 889.47,645.09 889.47,653.91 892.41,656.85 906.53,656.85 909.47,659.79 909.47,668.61 906.53,671.55 892.41,671.55 889.47,674.49 889.47,683.31 892.41,686.25 906.53,686.25 909.47,689.19 909.47,698.01 906.53,700.95 892.41,700.95 889.47,703.89 889.47,712.71 892.41,715.65 906.53,715.65 909.47,718.59 909.47,727.41 906.53,730.35 892.41,730.35 889.47,733.29 889.47,742.11 892.41,745.05 906.53,745.05 909.47,747.99 909.47,756.81 906.53,759.75 892.41,759.75 889.47,762.69 889.47,771.51 892.41,774.45 906.53,774.45 909.47,777.39 909.47,786.21 906.53,789.15 892.41,789.15 889.47,792.09 889.47,800.91 892.41,803.85 906.53,803.85 909.47,806.79 909.47,815.61 906.53,818.55 902.41,818.55 899.47,821.49 899.47,831.9 913.47,845.9 922.88,845.9 925.82,848.84 925.82,877.96 928.76,880.9 937.58,880.9 940.52,877.96 940.52,813.84 943.46,810.9 952.28,810.9 955.22,813.84 955.22,877.96 958.16,880.9 966.98,880.9 969.92,877.96 969.92,813.84 972.86,810.9 981.68,810.9 984.62,813.84 984.62,877.96 987.56,880.9 996.38,880.9 999.32,877.96 999.32,813.84 1002.26,810.9 1011.08,810.9 1014.02,813.84 1014.02,877.96 1016.96,880.9 1025.78,880.9 1028.72,877.96 1028.72,813.84 1031.66,810.9 1040.48,810.9 1043.42,813.84 1043.42,877.96 1046.36,880.9 1055.18,880.9 1058.12,877.96 1058.12,813.84 1061.06,810.9 1069.88,810.9 1072.82,813.84 1072.82,877.96 1075.76,880.9 1084.58,880.9 1087.52,877.96 1087.52,813.84 1090.46,810.9 1099.28,810.9 1102.22,813.84 1102.22,842.96 1105.16,845.9 1128.47,845.9 1489.47,1206.9 1489.47,1368.9 1524.24,1403.67 1524.24,1712.13 ; 1524.26,1769.01 1524.26,1762.69 1524.2,1762.63 1524.2,1712.17 ; 1713.47,1953.9 1713.47,1973.44 v2(1730.23,1990.2) ; 1524.2,1712.17 1524.24,1712.13
SD3_DATA6: J507.12 U1.E13 | length 3219.9
  Top Layer w4.7: J507.12@795.34,767.73 v5(847.3,767.73)
  Top Layer w6: v6(1635.47,2022.9) 1635.47,2021.96 U1.E13@1651.49,2005.95
  L6_INT_2 w4.5: 760.47,1060.9 760.47,854.56 v5(847.3,767.73) ; 1373.47,1692.9 1373.47,1998.9 1412.22,2037.65 1619.78,2037.65 1635.47,2021.96 v6(1635.47,2022.9)
  L6_INT_2 w4.7: 760.47,1060.9 812.47,1112.9 980.47,1112.9 988.47,1120.9 988.47,1125.06 978.48,1135.04 978.48,1139.2 984.72,1145.43 988.88,1145.43 1013,1121.31 1017.16,1121.31 1023.4,1127.55 1023.4,1131.7 1011.34,1143.77 999.27,1155.83 999.27,1159.99 1005.51,1166.22 1009.67,1166.22 1021.73,1154.16 1033.79,1142.1 1037.95,1142.1 1044.19,1148.33 1044.19,1152.49 1032.13,1164.56 1020.06,1176.62 1020.06,1180.78 1026.3,1187.01 1030.46,1187.01 1042.52,1174.95 1054.58,1162.89 1058.74,1162.89 1064.98,1169.12 1064.98,1173.28 1052.91,1185.34 1040.85,1197.41 1040.85,1201.57 1047.09,1207.8 1051.25,1207.8 1063.31,1195.74 1075.37,1183.68 1079.53,1183.68 1085.77,1189.91 1085.77,1194.07 1061.64,1218.2 1061.64,1222.35 1067.88,1228.59 1072.03,1228.59 1084.1,1216.53 1096.16,1204.46 1100.32,1204.46 1106.56,1210.7 1106.56,1214.86 1094.49,1226.92 1082.43,1238.99 1082.43,1243.14 1088.67,1249.38 1092.82,1249.38 1116.95,1225.25 1121.11,1225.25 1127.34,1231.49 1127.34,1235.65 1115.28,1247.71 1103.22,1259.77 1103.22,1263.93 1109.45,1270.17 1113.61,1270.17 1125.68,1258.11 1137.74,1246.04 1141.9,1246.04 1148.13,1252.28 1148.13,1256.44 1136.07,1268.5 1124.01,1280.56 1124.01,1284.72 1130.24,1290.96 1134.4,1290.96 1146.46,1278.89 1158.53,1266.83 1162.69,1266.83 1168.92,1273.07 1168.92,1277.23 1156.86,1289.29 1144.8,1301.35 1144.8,1305.51 1151.03,1311.75 1155.19,1311.75 1167.25,1299.68 1179.32,1287.62 1183.47,1287.62 1189.71,1293.86 1189.71,1298.01 1177.65,1310.08 1165.58,1322.14 1165.58,1326.3 1171.82,1332.54 1175.98,1332.54 1188.04,1320.47 1200.11,1308.41 1204.26,1308.41 1210.5,1314.65 1210.5,1318.8 1198.44,1330.87 1186.37,1342.93 1186.37,1347.09 1192.61,1353.32 1196.77,1353.32 1220.89,1329.2 1225.05,1329.2 1231.29,1335.43 1231.29,1339.59 1219.23,1351.66 1207.16,1363.72 1207.16,1367.88 1213.4,1374.11 1217.56,1374.11 1229.62,1362.05 1241.68,1349.99 1245.84,1349.99 1252.08,1356.22 1252.08,1360.38 1227.95,1384.51 1227.95,1388.67 1234.19,1394.9 1238.35,1394.9 1250.41,1382.84 1262.47,1370.78 1266.63,1370.78 1272.87,1377.01 1272.87,1381.17 1260.8,1393.23 1248.74,1405.3 1248.74,1409.45 1254.98,1415.69 1259.13,1415.69 1271.2,1403.63 1283.26,1391.56 1287.42,1391.56 1293.66,1397.8 1293.66,1401.96 1281.59,1414.02 1269.53,1426.09 1269.53,1430.24 1275.77,1436.48 1279.92,1436.48 1291.99,1424.42 1304.05,1412.35 1308.21,1412.35 1314.44,1418.59 1314.44,1422.75 1302.38,1434.81 1290.32,1446.87 1290.32,1451.03 1296.55,1457.27 1300.71,1457.27 1324.84,1433.14 1329,1433.14 1335.23,1439.38 1335.23,1443.54 1323.17,1455.6 1311.11,1467.66 1311.11,1471.82 1317.34,1478.06 1321.5,1478.06 1333.56,1465.99 1345.63,1453.93 1349.79,1453.93 1356.02,1460.17 1356.02,1464.33 1346.04,1474.31 1346.04,1478.47 1373.47,1505.9 1373.47,1692.9
SD3_DATA7: J507.13 U1.F13 | length 3228.8
  Top Layer w4.7: J507.13@795.34,866.16 v5@848.73,866.16
  Top Layer w6: U1.F13@1619.99,2005.95 1635.74,1990.2 1635.74,1990.9 1634.47,1990.9 1634.64,1991.07 v6(1634.64,1992.34)
  L6_INT_2 w4.5: 807.47,964.9 807.47,903.9 v5(846.47,864.9) ; 1431.47,1714.9 1431.47,1967.9 1460.65,1997.08 1628.86,1997.08 1635.74,1990.2 1635.74,1990.9 1634.47,1990.9 1634.64,1991.07 v6(1634.64,1992.34)
  L6_INT_2 w4.7: 807.47,964.9 849.47,1006.9 1036.47,1006.9 1041.84,1012.27 1041.84,1016.43 1028.32,1029.95 1028.32,1034.11 1034.56,1040.35 1038.72,1040.35 1069.92,1009.15 1074.07,1009.15 1080.31,1015.39 1080.31,1019.54 1064.71,1035.14 1049.11,1050.74 1049.11,1054.9 1055.35,1061.14 1059.51,1061.14 1075.11,1045.54 1090.71,1029.94 1094.86,1029.94 1101.1,1036.17 1101.1,1040.33 1069.9,1071.53 1069.9,1075.69 1076.14,1081.92 1080.3,1081.92 1111.49,1050.73 1115.65,1050.73 1121.89,1056.96 1121.89,1061.12 1106.29,1076.72 1090.69,1092.32 1090.69,1096.48 1096.93,1102.71 1101.09,1102.71 1132.28,1071.52 1136.44,1071.52 1142.68,1077.75 1142.68,1081.91 1111.48,1113.11 1111.48,1117.27 1117.72,1123.5 1121.87,1123.5 1137.47,1107.9 1153.07,1092.3 1157.23,1092.3 1163.47,1098.54 1163.47,1102.7 1147.87,1118.3 1132.27,1133.9 1132.27,1138.05 1138.51,1144.29 1142.66,1144.29 1173.86,1113.09 1178.02,1113.09 1184.26,1119.33 1184.26,1123.49 1168.66,1139.09 1153.06,1154.69 1153.06,1158.84 1159.29,1165.08 1163.45,1165.08 1179.05,1149.48 1194.65,1133.88 1198.81,1133.88 1205.04,1140.12 1205.04,1144.28 1173.85,1175.47 1173.85,1179.63 1180.08,1185.87 1184.24,1185.87 1215.44,1154.67 1219.6,1154.67 1225.83,1160.91 1225.83,1165.07 1210.23,1180.66 1194.64,1196.26 1194.64,1200.42 1200.87,1206.66 1205.03,1206.66 1236.23,1175.46 1240.39,1175.46 1246.62,1181.7 1246.62,1185.85 1215.42,1217.05 1215.42,1221.21 1221.66,1227.45 1225.82,1227.45 1241.42,1211.85 1257.02,1196.25 1261.17,1196.25 1267.41,1202.49 1267.41,1206.64 1251.81,1222.24 1236.21,1237.84 1236.21,1242 1242.45,1248.24 1246.61,1248.24 1277.81,1217.04 1281.96,1217.04 1288.2,1223.28 1288.2,1227.43 1272.6,1243.03 1257,1258.63 1257,1262.79 1263.24,1269.02 1267.4,1269.02 1283,1253.43 1298.59,1237.83 1302.75,1237.83 1308.99,1244.06 1308.99,1248.22 1277.79,1279.42 1277.79,1283.58 1284.03,1289.81 1288.19,1289.81 1319.38,1258.62 1323.54,1258.62 1329.78,1264.85 1329.78,1269.01 1314.18,1284.61 1298.58,1300.21 1298.58,1304.37 1304.82,1310.6 1308.98,1310.6 1340.17,1279.41 1344.33,1279.41 1350.57,1285.64 1350.57,1289.8 1319.37,1321 1319.37,1325.15 1325.61,1331.39 1329.76,1331.39 1345.36,1315.79 1360.96,1300.19 1365.12,1300.19 1371.36,1306.43 1371.36,1310.59 1340.16,1341.79 1340.16,1345.94 1346.4,1352.18 1350.55,1352.18 1364.07,1338.66 1368.23,1338.66 1431.47,1401.9 1431.47,1714.9
SD4_CLK: U1.E16 U512A.M6 | length 806.8
  Top Layer w4.5: v6(2309.89,1680.33) U512A.M6@2331,1680.33
  Top Layer w6: U1.E16@1651.49,1911.46 1667.5,1895.45 v2(1667.5,1893.88)
  L6_INT_2 w4.5: 1745.47,1864.93 1745.47,1827.9 1755.47,1817.9 1800.47,1817.9 1814.47,1803.9 2186.32,1803.9 v6(2309.89,1680.33)
  L6_INT_2 w4.7: v2(1667.5,1893.88) 1667.5,1895.45 1667.23,1895.71 1674.42,1902.9 1697.47,1902.9 1724.47,1875.9 1734.5,1875.9 1745.47,1864.93
SD4_CMD: R20.1 U1.B17 U512A.M5 | length 806.6
  Top Layer w4.5: v6(2309.73,1660.64) U512A.M5@2331,1660.64
  Top Layer w6: U1.B17@1745.97,1879.96 v2(1761.72,1864.22)
  L6_INT_2 w4.5: v2(1761.72,1864.22) 1764.17,1861.77 1838.6,1861.77 1874.97,1825.4 1882.88,1825.4 1885.78,1828.3 1885.78,1832.5 1888.68,1835.4 1897.38,1835.4 1900.28,1832.5 1900.28,1818.3 1903.18,1815.4 1911.88,1815.4 1914.78,1818.3 1914.78,1832.5 1917.68,1835.4 1926.38,1835.4 1929.28,1832.5 1929.28,1827.09 1936.29,1820.08 1996.88,1820.08 2001.36,1824.56 2028.64,1824.56 2033.12,1820.08 2194.29,1820.08 2322.64,1691.72 2322.64,1673.56 v6(2309.73,1660.64)
  Bottom Layer w6: v6(2309.73,1660.64) 2335.4,1686.31 R20.1@2342.47,1686.31
SD4_DATA0: U1.D18 U512A.A3 | length 806.4
  Top Layer w3: v5@2051.47,1573.9 2098.84,1621.27 U512A.A3@2114.47,1621.27
  Top Layer w6: U1.D18@1682.98,1848.47 v2(1698.73,1832.72)
  L3_INT_1 w4.7: v2(1698.73,1832.72) 1700.65,1832.72 1714.5,1818.87 1768.5,1818.87 1778.47,1808.9 1778.47,1790.9 1817.97,1751.4 1817.97,1594.9 1858.97,1553.9 1884.28,1553.9 1887.22,1556.84 1887.22,1570.96 1890.16,1573.9 1898.98,1573.9 1901.92,1570.96 1901.92,1556.84 1904.86,1553.9 1913.68,1553.9 1916.62,1556.84 1916.62,1570.96 1919.56,1573.9 1928.38,1573.9 1931.32,1570.96 1931.32,1556.84 1934.26,1553.9 1943.08,1553.9 1946.02,1556.84 1946.02,1570.96 1948.96,1573.9 1957.78,1573.9 1960.72,1570.96 1960.72,1556.84 1963.66,1553.9 1972.48,1553.9 1975.42,1556.84 1975.42,1570.96 1978.36,1573.9 1987.18,1573.9 1990.12,1570.96 1990.12,1565.25 1991.47,1563.9 2042.47,1563.9 v5(2051.47,1572.9)
  L6_INT_2 w4.5: v5@2048.47,1572.9 v5(2051.47,1572.9) v5@2051.47,1573.9
SD4_DATA1: U1.B19 U512A.A4 | length 805.7
  Top Layer w3: v5@2052.47,1625.9 2067.53,1640.95 U512A.A4@2114.47,1640.95
  Top Layer w6: U1.B19@1745.97,1816.97 v2(1761.72,1801.22)
  L6_INT_2 w4.5: v2(1761.72,1801.22) 1799.05,1763.9 1865.12,1763.9 1870.12,1758.9 1878.82,1758.9 1881.72,1761.8 1881.72,1766 1884.62,1768.9 1893.32,1768.9 1896.22,1766 1896.22,1761.8 1899.12,1758.9 1907.82,1758.9 1910.72,1761.8 1910.72,1762.15 1912.47,1763.9 2095.44,1763.9 2102.47,1756.87 2102.47,1743.55 2105.37,1740.65 2114.57,1740.65 2117.47,1737.75 2117.47,1729.05 2114.57,1726.15 2090.37,1726.15 2087.47,1723.25 2087.47,1714.55 2090.37,1711.65 2114.57,1711.65 2117.47,1708.75 2117.47,1700.05 2114.57,1697.15 2090.37,1697.15 2087.47,1694.25 2087.47,1685.55 2090.37,1682.65 2114.57,1682.65 2117.47,1679.75 2117.47,1671.05 2114.57,1668.15 2090.37,1668.15 2087.47,1665.25 2087.47,1656.55 2090.37,1653.65 2099.57,1653.65 2103.89,1649.33 2103.89,1635.32 2092.47,1623.9 2050.47,1623.9 v5(2050.47,1621.9)
SD4_DATA2: U1.F17 U512A.A5 | length 806.8
  Top Layer w3: v5(2050.47,1680.9) 2070.73,1660.64 U512A.A5@2114.47,1660.64
  Top Layer w6: U1.F17@1619.99,1879.96 v2(1635.74,1864.22)
  L6_INT_2 w4.5: v2(1635.74,1864.22) 1650.42,1878.9 1705.4,1878.9 1713.47,1870.83 1713.47,1822.9 1719.47,1816.9 1741.47,1816.9 1747.47,1810.9 1747.47,1765.9 1767.47,1745.9 1813.47,1745.9 1878.47,1680.9 1890.82,1680.9 1893.72,1683.8 1893.72,1692.3 1897.13,1695.71 1904.43,1695.71 1907.41,1692.72 1907.41,1684.61 1911.12,1680.9 1919.82,1680.9 1922.72,1683.8 1922.72,1698 1925.62,1700.9 1934.32,1700.9 1937.22,1698 1937.22,1683.8 1940.12,1680.9 1948.82,1680.9 1951.72,1683.8 1951.72,1698 1954.62,1700.9 1963.32,1700.9 1966.22,1698 1966.22,1683.8 1969.12,1680.9 1977.82,1680.9 1980.72,1683.8 1980.72,1698 1983.62,1700.9 1992.32,1700.9 1995.22,1698 1995.22,1683.8 1998.12,1680.9 2006.82,1680.9 2009.72,1683.8 2009.72,1698 2012.62,1700.9 2021.32,1700.9 2024.22,1698 2024.22,1683.8 2027.12,1680.9 v5(2050.47,1680.9)
SD4_DATA3: U1.A20 U512A.B2 | length 806.9
  Top Layer w3: v5(2051.47,1546.9) 2088.47,1583.9 2088.47,1598.9 2101.47,1611.9 2110.41,1611.9 2110.53,1611.77 2121.6,1611.77 ; 2121.94,1611.77 2123.97,1611.77 U512A.B2@2134.16,1601.59
  Top Layer w4.5: U1.A20@1777.47,1785.48 1811.89,1785.48 v2(1819.47,1777.9)
  L6_INT_2 w4.5: v2(1819.47,1777.9) 1820.47,1778.9 1839.62,1778.9 1844.62,1783.9 1853.32,1783.9 1858.32,1778.9 1868.62,1778.9 1873.62,1783.9 1882.32,1783.9 1887.32,1778.9 1897.62,1778.9 1902.62,1783.9 1911.32,1783.9 1914.22,1781 1914.22,1776.8 1917.12,1773.9 1925.82,1773.9 1928.72,1776.8 1928.72,1781 1931.62,1783.9 1940.32,1783.9 1943.22,1781 1943.22,1776.8 1946.12,1773.9 1954.82,1773.9 1957.72,1776.8 1957.72,1781 1960.62,1783.9 1969.32,1783.9 1972.22,1781 1972.22,1776.8 1975.12,1773.9 1983.82,1773.9 1986.72,1776.8 1986.72,1781 1989.62,1783.9 1998.32,1783.9 2001.22,1781 2001.22,1776.8 2004.12,1773.9 2012.82,1773.9 2015.72,1776.8 2015.72,1781 2018.62,1783.9 2027.32,1783.9 2030.22,1781 2030.22,1776.8 2033.12,1773.9 2041.82,1773.9 2044.72,1776.8 2044.72,1781 2047.62,1783.9 2056.32,1783.9 2061.32,1778.9 2107.47,1778.9 2128.47,1757.9 2128.47,1623.9 v5(2051.47,1546.9)
SD4_DATA4: U1.E18 U512A.B3 | length 806.2
  Top Layer w3: v5@2054.47,1595.9 2089.47,1630.9 2124.53,1630.9 U512A.B3@2134.16,1621.27
  Top Layer w6: U1.E18@1651.49,1848.47 v2(1667.23,1832.72)
  L6_INT_2 w4.5: v2(1667.23,1832.72) 1667.23,1805.14 1714.47,1757.9 1714.47,1734.54 1727.92,1721.09 1735.32,1721.09 1745.47,1710.94 1745.47,1703.54 1757.11,1691.9 1813.47,1691.9 1825.47,1679.9 1825.47,1601.61 1830.18,1596.9 1840.82,1596.9 1843.72,1599.8 1843.72,1604 1846.62,1606.9 1855.32,1606.9 1858.22,1604 1858.22,1594.76 1861.08,1591.9 1869.92,1591.9 1872.72,1594.7 1872.72,1604 1875.62,1606.9 1884.32,1606.9 1887.22,1604 1887.22,1589.8 1890.66,1586.36 1898.28,1586.36 1901.72,1589.8 1901.72,1604 1904.62,1606.9 1913.32,1606.9 1916.22,1604 1916.22,1589.8 1919.79,1586.23 1927.15,1586.23 1930.72,1589.8 1930.72,1604 1933.62,1606.9 1942.32,1606.9 1945.22,1604 1945.22,1589.8 1948.12,1586.9 1956.82,1586.9 1959.72,1589.8 1959.72,1596.15 1960.47,1596.9 v5(2050.47,1596.9) v5@2050.47,1599.9
SD4_DATA5: U1.C19 U512A.B4 | length 805.1
  Top Layer w3: v5@2051.47,1650.9 2124.21,1650.9 U512A.B4@2134.16,1640.95
  Top Layer w6: U1.C19@1714.48,1816.97 v2(1730.23,1801.22)
  L6_INT_2 w4.5: v2(1730.23,1801.22) 1730.23,1770.2 1763.53,1736.9 1806.47,1736.9 1854.47,1688.9 1854.47,1649.9 1858.47,1645.9 1874.47,1645.9 1877.72,1649.15 1877.72,1666 1880.62,1668.9 1889.32,1668.9 1892.22,1666 1892.22,1641.8 1895.12,1638.9 1903.82,1638.9 1906.72,1641.8 1906.72,1666 1909.62,1668.9 1918.32,1668.9 1921.22,1666 1921.22,1641.8 1924.12,1638.9 1932.82,1638.9 1935.72,1641.8 1935.72,1666 1938.62,1668.9 1947.32,1668.9 1950.22,1666 1950.22,1641.8 1953.12,1638.9 1961.82,1638.9 1964.72,1641.8 1964.72,1666 1967.62,1668.9 1976.32,1668.9 1979.22,1666 1979.22,1641.8 1982.12,1638.9 1990.82,1638.9 1993.72,1641.8 1993.72,1666 1996.62,1668.9 2005.32,1668.9 2008.22,1666 2008.22,1641.8 2011.12,1638.9 2019.82,1638.9 2022.72,1641.8 2022.72,1651 2025.62,1653.9 v5(2050.47,1653.9)